# Altium PCB main.PcbDoc
Units mm, origin at the board's own origin, x right, y up, seen from the top; angles counter-clockwise.
Board outline 79 x 84 mm, 2 copper layers (Top Layer, Bottom Layer); 85 components, 80 nets, 350 pads, 74 vias.
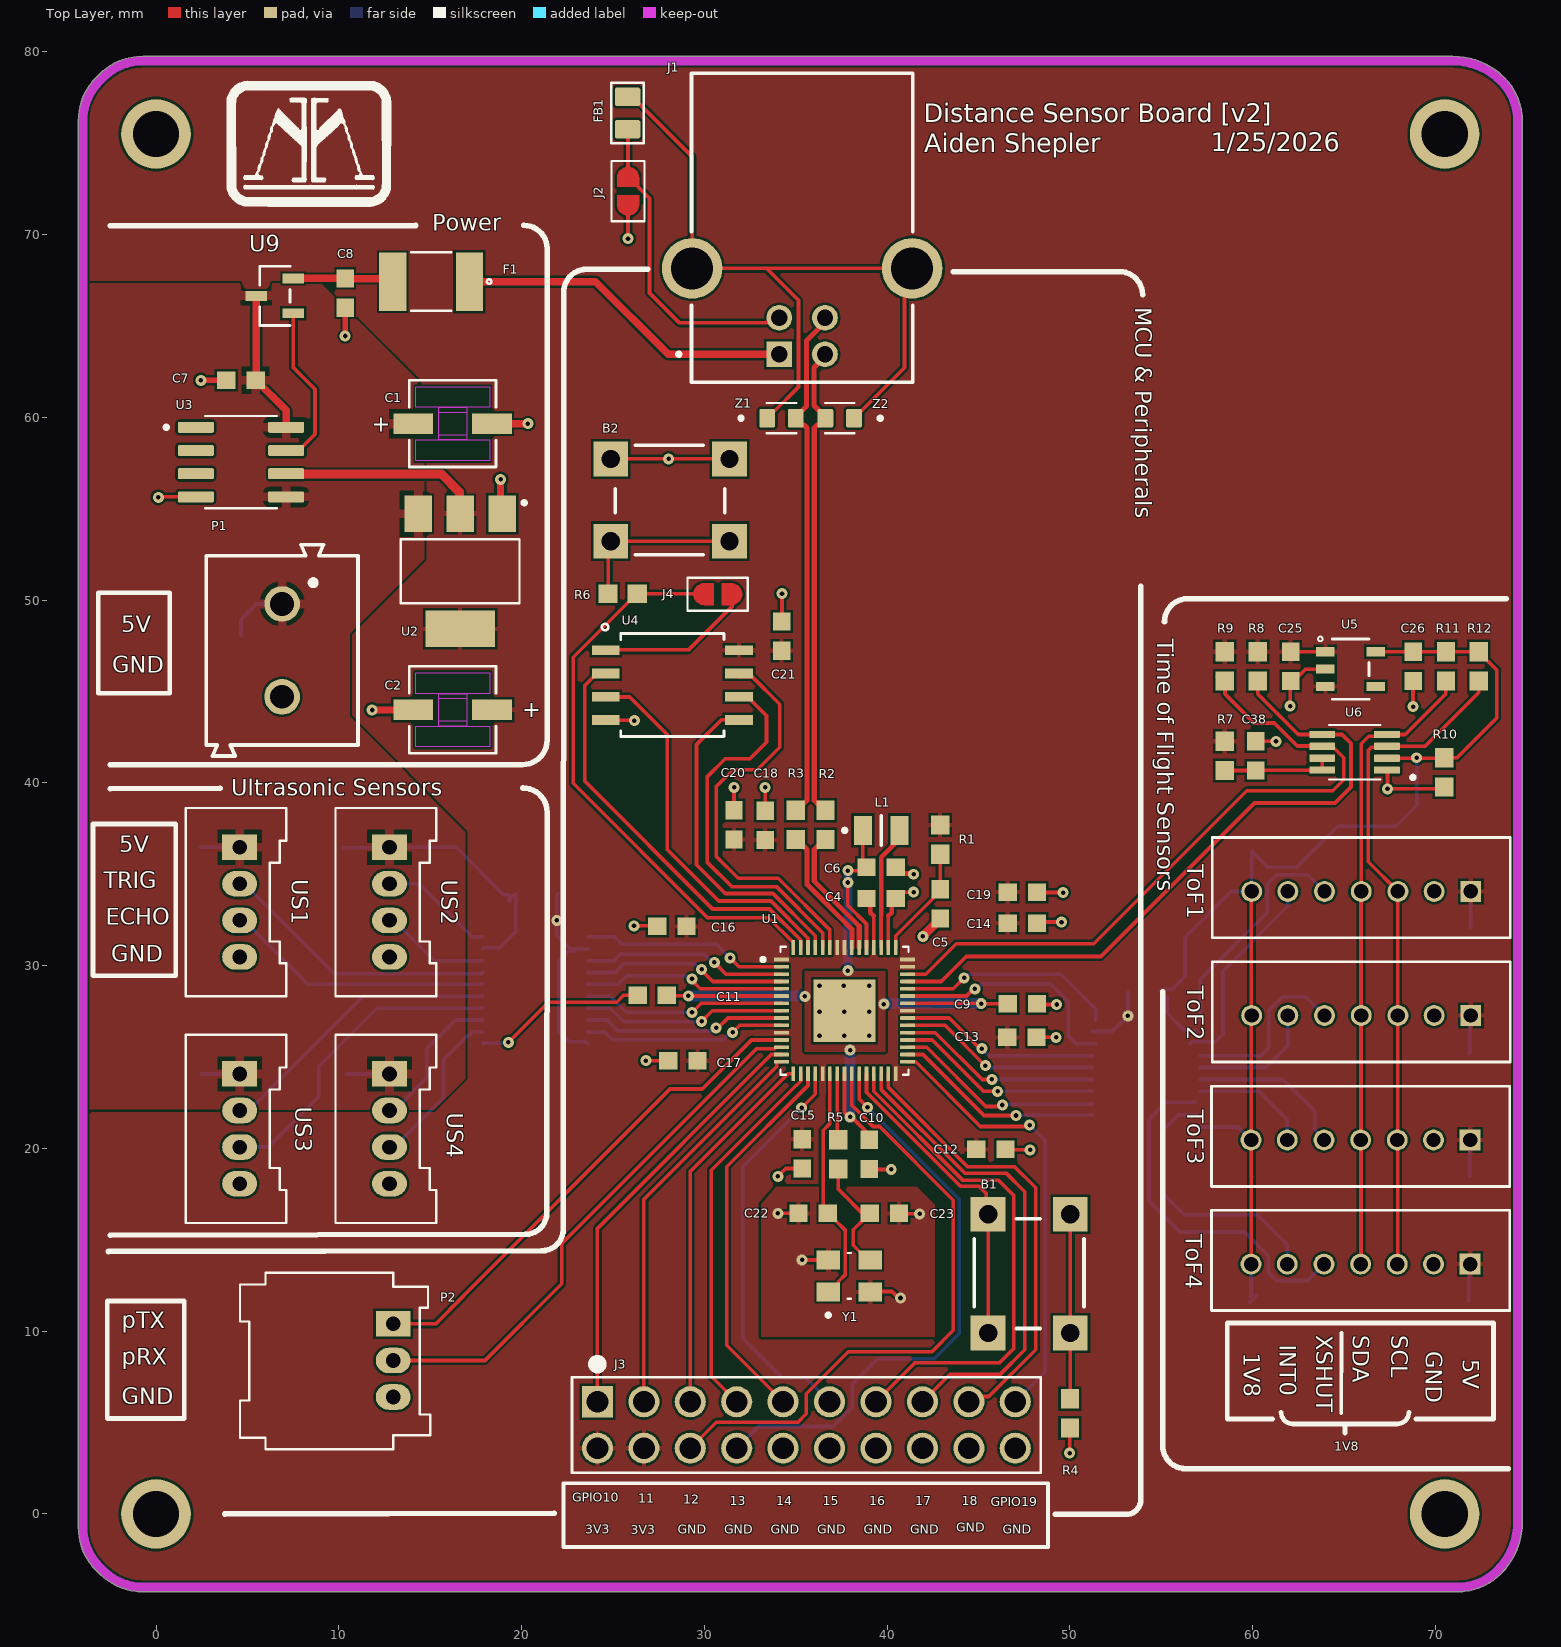
[diagram p0: Top Layer view]
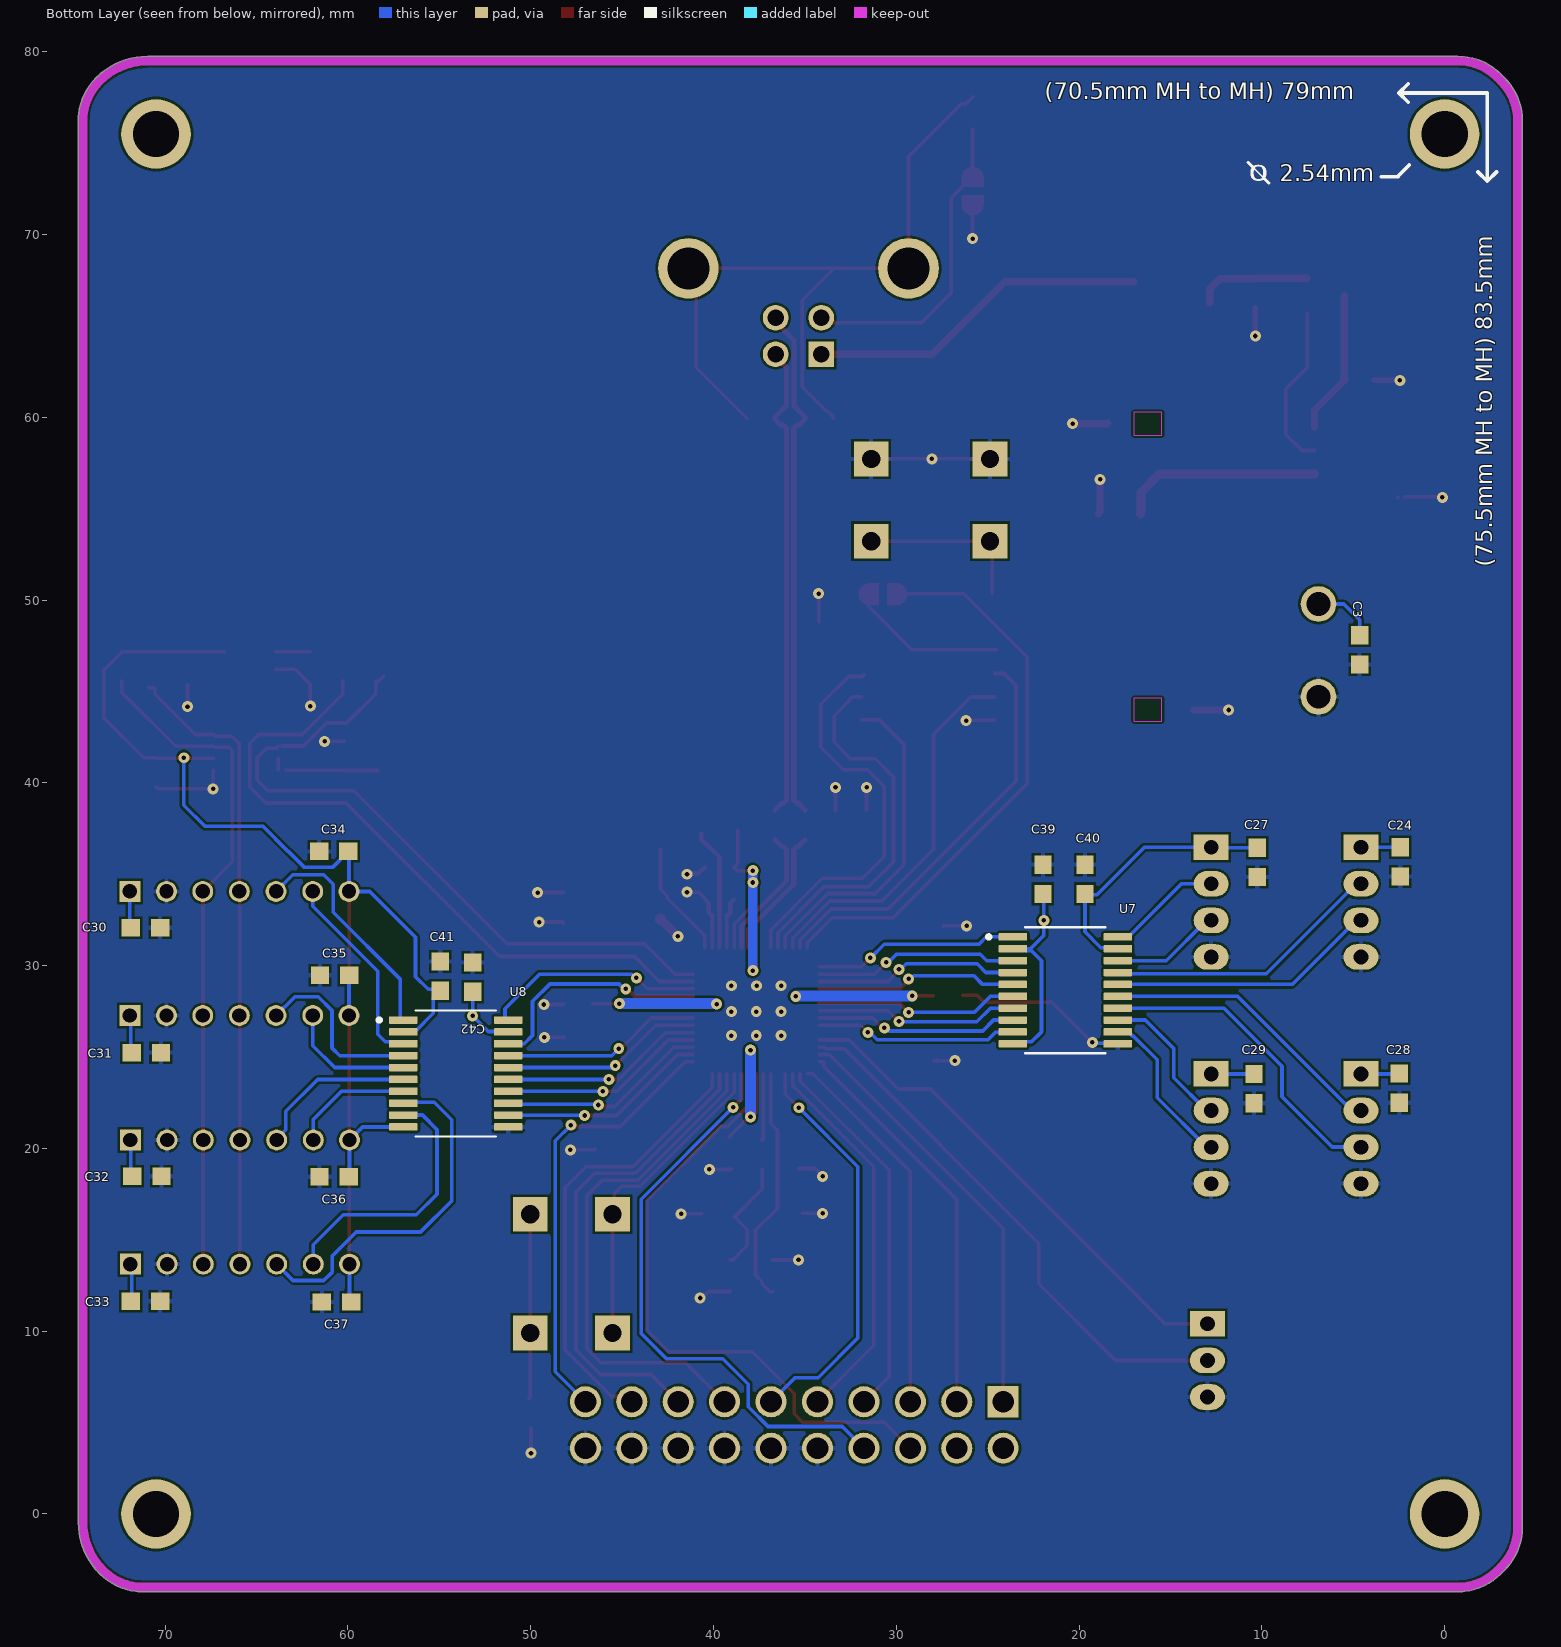
[diagram p1: Bottom Layer view, seen from below]

## Layer stack, top to bottom
Top Solder: solder mask 0.0102, Solder Resist, Dk 3.5
Top Layer: signal copper 0.0356
Dielectric 1: dielectric 0.32, FR-4, Dk 4.8
Bottom Layer: signal copper 0.0356
Bottom Solder: solder mask 0.0102, Solder Resist, Dk 3.5

## Board outline
-3.279,-3.075 cw(c-0.934,-0.73) -4.25,-0.73 -4.25,76.23 cw(c-0.934,76.23) -3.279,78.575 -3.075,78.779 cw(c-0.73,76.434) -0.73,79.75 70.942,79.75 cw(c70.942,75.738) 73.779,78.575 cw(c71.434,76.23) 74.73,76.6 74.75,76.5 74.75,-0.442 cw(c70.738,-0.442) 73.575,-3.279 cw(c71.23,-0.934) 71.6,-4.23 71.5,-4.25 -1,-4.25 -1.1,-4.23 cw(c-0.73,-0.934) -3.075,-3.279

## Design rules (kind name [scope] priority, off if disabled: settings)
Clearance [All] p1: gap=0.125 ignorepadtopadclearanceinfootprint=FALSE
DiffPairsRouting [All] p1: maxlimit=0.127 minlimit=0.127 mostfreqgap=0.127 toplayer_minwidth=0.2 toplayer_maxwidth=0.277 toplayer_prefwidth=0.277 bottomlayer_minwidth=0.2 bottomlayer_maxwidth=0.277 bottomlayer_prefwidth=0.277 impedanceprofiledriven=TRUE impedanceprofileid={42F0FB0B-BD3A-4B47-9FD5-915A8C1A7547} impedanceprofilevalue=90.000000 maxuncoupledlength=12.7
MinimumSolderMaskSliver [All] p1: minsoldermaskwidth=0.125
PlaneClearance [InNet('NetFB1_1')] p1: clearance=0.125
PlaneClearance PlaneClearance_1 [All] p2: clearance=0.125
PolygonConnect Polygon_5V_Connect [IsNamedPolygon('T.5V')] p1: connectstyle=Relief reliefconductorwidth=0.5 reliefentries=4 polygonreliefangle="90 Angle" airgapwidth=0.254
PolygonConnect Polygon_1V1-2_Connect_Direct [IsNamedPolygon('T.1V1-2')] p2: connectstyle=Direct reliefconductorwidth=0.254 reliefentries=4 polygonreliefangle="90 Angle" airgapwidth=0.254
PolygonConnect Polygon_3V3-1_Connect_Direct [IsNamedPolygon('T.3V3-1')] p3: connectstyle=Direct reliefconductorwidth=0.254 reliefentries=4 polygonreliefangle="90 Angle" airgapwidth=0.254
PolygonConnect Polygon_3V3-2/GND-12/1V1-1_Connect_Relief90 [IsNamedPolygon('T.1V1-1') or IsNamedPolygon('T.GND-1') or IsNamedPolygon('B.GND-1') or IsNamedPolygon('T.3V3-2') vs (IsThruPin or IsSMTPin or IsPad or IsComponentPad)] p4: connectstyle=Relief reliefconductorwidth=0.254 reliefentries=4 polygonreliefangle="90 Angle" airgapwidth=0.125
PolygonConnect Polygon_3V3-2/GND-12/1V1-1_Connect_Direct [IsNamedPolygon('T.1V1-1') or IsNamedPolygon('T.GND-1') or IsNamedPolygon('T.3V3-2') or IsNamedPolygon('B.GND-1') vs IsVia] p5: connectstyle=Direct reliefconductorwidth=0.254 reliefentries=4 polygonreliefangle="90 Angle" airgapwidth=0.254
RoutingVias [All] p1: holewidth=0.711 width=1.27 viastyle="Through Hole" minholewidth=0.2 minwidth=0.35 maxholewidth=0.711 maxwidth=1.27
SilkToSilkClearance [All] p1: silktosilkclearance=0.125
SilkToSolderMaskClearance [IsPad] p1: minsilkscreentomaskgap=0.125 clearancetoexposedcopper=TRUE
SolderMaskExpansion [All] p1: expansion=0.102 istentingtop=FALSE
SupplyNets "Schematic Supply Nets_4" [InNet('1V1')] p1: voltage=0.000
SupplyNets "Schematic Supply Nets_3" [InNet('1V8')] p2: voltage=0.000
SupplyNets "Schematic Supply Nets_2" [InNet('5V')] p3: voltage=0.000
SupplyNets "Schematic Supply Nets_1" [InNet('GND')] p4: voltage=0.000
SupplyNets "Schematic Supply Nets" [InNet('3V3')] p5: voltage=0.000
Width [All] p1: maxlimit=0.6 minlimit=0.2 preferedwidth=0.2
25 further rules are at their usual default settings.

## Classes and differential pairs
component class MCU: ` B1 B2 C1 C2 C3 C4 C5 C6 C7 C8 C9 C10 C11 C12 C13 C14 C15 C16 C17 C18 C19 C20 C21 C22 C23 F1 FB1 J1 J2 J3 J4 L1 P1 P2 R1 R2 R3 R4 R5 R6 U1 U2 U3 U4 U9 Y1 Z1 Z2
component class Distance-Sensors: C24 C25 C26 C27 C28 C29 C30 C31 C32 C33 C34 C35 C36 C37 C38 C39 C40 C41 C42 R7 R8 R9 R10 R11 R12 ToF1 ToF2 ToF3 ToF4 U5 U6 U7 U8 US1 US2 US3 US4
differential pair DX: +DX_P -DX_N
differential pair D: +D_P -D_N

## Components (designator, comment, footprint, x,y, rotation, side; value= is the part's Value field where it differs from the comment)
B1 "BOOT" SPST-PUSH-BUTTON 47.775,13.15 r0 top
B2 "BOOT" SPST-PUSH-BUTTON 28.125,55.475 r90 top
C1 "10uF" RADIAL_CAN_CAP_4_X_5.8_SMD 16.234,59.65 r0 top
C2 "10uF" RADIAL_CAN_CAP_4_X_5.8_SMD 16.234,44 r180 top
C3 "Cap" CAPC0603 4.65,47.275 r270 bottom value=100nF
C4 "Cap" CAPC0603 39.675,33.675 r0 top value=4.7uF
C5 "Cap" CAPC0603 42.9,33.375 r270 top value=4.7uF
C6 "Cap" CAPC0603 39.675,35.375 r0 top value=4.7uF
C7 "Cap" CAPC0603 4.65,62.025 r180 top value=100nF
C8 "Cap" CAPC0603 10.35,66.8 r90 top value=100nF
C9 "Cap" CAPC0603 47.4,27.925 r0 top value=100nF
C10 "Cap" CAPC0603 39.025,19.675 r270 top value=4.7uF
C11 "Cap" CAPC0603 27.15,28.375 r180 top value=100nF
C12 "Cap" CAPC0603 45.675,19.95 r0 top value=100nF
C13 "Cap" CAPC0603 47.375,26.075 r0 top value=100nF
C14 "Cap" CAPC0603 47.4,32.325 r0 top value=100nF
C15 "Cap" CAPC0603 35.35,19.7 r270 top value=100nF
C16 "Cap" CAPC0603 28.225,32.15 r180 top value=100nF
C17 "Cap" CAPC0603 28.825,24.8 r180 top value=100nF
C18 "Cap" CAPC0603 33.325,37.675 r90 top value=100nF
C19 "Cap" CAPC0603 47.4,34.025 r0 top value=100nF
C20 "Cap" CAPC0603 31.625,37.7 r90 top value=100nF
C21 "Cap" CAPC0603 34.225,48.025 r90 top value=100nF
C22 "Cap" CAPC0603 35.95,16.45 r180 top value=15pF
C23 "Cap" CAPC0603 39.85,16.45 r0 top value=15pF
C24 "Cap" CAPC0603 2.425,35.675 r270 bottom value=100nF
C25 "Cap" CAPC0603 62.075,46.375 r270 top value=1uF
C26 "Cap" CAPC0603 68.775,46.375 r270 top value=1uF
C27 "Cap" CAPC0603 10.25,35.65 r270 bottom value=100nF
C28 "Cap" CAPC0603 2.475,23.3 r270 bottom value=100nF
C29 "Cap" CAPC0603 10.425,23.275 r270 bottom value=100nF
C30 "Cap" CAPC0603 71.075,32.075 r180 bottom value=100nF
C31 "Cap" CAPC0603 71.031,25.239 r180 bottom value=100nF
C32 "Cap" CAPC0603 71,18.475 r180 bottom value=100nF
C33 "Cap" CAPC0603 71.075,11.639 r180 bottom value=100nF
C34 "Cap" CAPC0603 60.775,36.25 r0 bottom value=100nF
C35 "Cap" CAPC0603 60.725,29.475 r0 bottom value=100nF
C36 "Cap" CAPC0603 60.75,18.45 r0 bottom value=100nF
C37 "Cap" CAPC0603 60.625,11.6 r0 bottom value=100nF
C38 "Cap" CAPC0603 60.175,41.475 r90 top value=100pF
C39 "Cap" CAPC0603 21.975,34.725 r270 bottom value=100nF
C40 "Cap" CAPC0603 19.675,34.725 r90 bottom value=100nF
C41 "Cap" CAPC0603 54.95,29.425 r270 bottom value=100nF
C42 "Cap" CAPC0603 53.175,29.375 r270 bottom value=100nF
F1 "MF-MSMF050-2" FUSM4632X85 15.05,67.425 r180 top
FB1 "MH2029-300Y" L0805 25.8,76.65 r270 top
J1 "USB-B" SAMTEC_USB-B-S-X-X-TH 35.35,68.15 r180 top
J2 "Thru-Hole Jumper" "[Jumper] Solderable Jumper" 25.825,72.375 r270 top
J3 "[Connector] 879142016" "[Connector] CONN20" 24.15,6.14 r0 top
J4 "Thru-Hole Jumper" "[Jumper] Solderable Jumper" 30.73,50.325 r0 top
L1 "3.3uH" 2016_SMD_Inductor 39.675,37.4 r0 top
P1 "2 port screw" "[CONNECTOR] 5MM_2PORT_SCREW" 6.9,47.25 r270 top
P2 "UART" MOLEX-HDR-1X3-SHERLOCK-RA 12.975,10.4 r90 top
R1 "Res" RES0603 42.9,36.9 r270 top value=33
R2 "Res" RES0603 36.625,37.7 r270 top value=27
R3 "Res" RES0603 35,37.7 r270 top value=27
R4 "Res" RES0603 50,5.5 r90 top value=1k
R5 "Res" RES0603 37.325,19.675 r90 top value=1k
R6 "Res" RES0603 25.525,50.35 r0 top value=1k
R7 "Res" RES0603 58.475,41.475 r270 top value=200k
R8 "Res" RES0603 60.275,46.375 r270 top value=1k
R9 "Res" RES0603 58.475,46.375 r270 top value=1k
R10 "Res" RES0603 70.475,40.575 r270 top value=300k
R11 "Res" RES0603 70.575,46.375 r270 top value=1k
R12 "Res" RES0603 72.375,46.375 r270 top value=1k
ToF1 "ToF 1" 7POS_2MM_CONN 71.933,34.061 r0 top
ToF2 "ToF 2" 7POS_2MM_CONN 71.933,27.27 r0 top
ToF3 "ToF 3" 7POS_2MM_CONN 71.9,20.461 r0 top
ToF4 "ToF 4" 7POS_2MM_CONN 71.9,13.67 r0 top
U1 "[MCU] RP2350" QFN40P700X700X90-61N 37.67,27.536 r0 top
U2 "NCP1117LPST33T3G" SOT230P700X175-4N 16.641,51.575 r270 top
U3 "LMV358IDR" SOIC-8 4.65,57.55 r0 top
U4 "W25Q128JVSIQ TR" SOIC_208MIL_WIN 28.25,45.35 r0 top
U5 "ADPL40502AUJZ-1.8-R7" TSOT-23-5_UJ-5_ADI 65.353,46.225 r0 top
U6 "PCA9306DCTR" SOP65P400X130-8N 65.575,41.675 r180 top
U7 "[IC] TXS0108EQPWRQ1" SOP65P640X120-20N 20.75,28.65 r180 bottom
U8 "[IC] TXS0108EQPWRQ1" SOP65P640X120-20N 54.1,24.1 r180 bottom
U9 "PMV48XP,215" SOT23_NEX 6.499,66.644 r90 top
US1 "USS1" MOLEX-HDR-1X4-SHERLOCK-VERT 4.575,36.475 r90 top
US2 "USS2" MOLEX-HDR-1X4-SHERLOCK-VERT 12.775,36.475 r90 top
US3 "USS3" MOLEX-HDR-1X4-SHERLOCK-VERT 4.575,24.075 r90 top
US4 "USS4" MOLEX-HDR-1X4-SHERLOCK-VERT 12.775,24.075 r90 top
Y1 "ABM8-272-T3" XTAL_ABM8-272-T3 37.925,13.025 r90 top
Z1 "VAR" VARC1608X56N 34.22,59.95 r0 top
Z2 "VAR" VARC1608X56N 37.405,59.95 r180 top

## Footprints (in the part's own frame and the unit in brackets; to place one, negate y for a bottom-side part, rotate by r counter-clockwise, add the part's x,y. Pads: shape width x height; smd on the part's side, far side on the other; paste and mask are expansions set on the pad)
7POS_2MM_CONN [mil]
  rect 45x45 / inner round 45 / far side rect 45x45 hole 31: 1(0,0)
  round 45 hole 31: 2(-79,0) 3(-157,0) 4(-236,0) 5(-315,0) 6(-394,0) 7(-472,0)
  silkscreen extent -557,-100 85,116, body extent -556,-100 86,118, height 337
2016_SMD_Inductor [mm] "0806 (2016 Metric)"
  rect 1x1.6 smd: 1(-1,0) 2(1,0)
  silkscreen extent -2.1,-0.8 0,0.8, body extent -1,-0.8 1,0.8, height 0.95
"[CONNECTOR] 5MM_2PORT_SCREW" [mm] "5.08 mm pitch 2 port screw terminal / 691213510002"
  round 1.95 hole 1.3: 1(-2.54,0) 2(2.54,0)
  silkscreen extent -5.78,-4.15 5.78,4.15, body extent -5.68,-4.04 5.68,4.06, height 10
"[Connector] CONN20" [mil]
  rect 67x67 / inner round 67 / far side rect 67x67 hole 47: 1(0,0)
  round 67 hole 47: 2(0,-100) 3(100,0) 4(100,-100) 5(200,0) 6(200,-100) 7(300,0) 8(300,-100) 9(400,0) 10(400,-100) 11(500,0) 12(500,-100) 13(600,0) 14(600,-100) 15(700,0) 16(700,-100) 17(800,0) 18(800,-100) 19(900,0) 20(900,-100)
  silkscreen extent -55,-153 955,91, body extent -50,-151 950,45, height 325
"[Jumper] Solderable Jumper" [mil]
  round 1 smd: 1(-30.71,0) 2(30.71,0)
  Top Layer region: 8.9,-23.62 8.9,23.62 28.9,23.62 28.9,23.62 39.15,21.28 47.37,14.73 51.93,5.26 51.93,-5.26 47.37,-14.73 39.15,-21.28 28.9,-23.62 28.9,-23.62
  Top Layer region: -8.9,-23.62 -8.9,23.62 -28.9,23.62 -28.9,23.62 -39.15,21.28 -47.37,14.73 -51.93,5.26 -51.93,-5.26 -47.37,-14.73 -39.15,-21.28 -28.9,-23.62 -28.9,-23.62
  silkscreen extent -65,-35 65,35
CAPC0603 [mm] "Chip Capacitor, 2-Leads, Body 1.60x0.80mm, IPC Medium Density"
  rect 1x0.95 smd: 1(-0.8,0) 2(0.8,0)
  body extent -0.88,-0.48 0.87,0.48, height 0.8
FUSM4632X85 [mm]
  rect 1.5x3.2 smd: 1(-2.1,0) 2(2.1,0)
  silkscreen extent -3.3,-1.6 1.1,1.6, body extent -2.27,-1.62 2.27,1.62, height 1.1
L0805 [mil]
  rrect25% 40x55 smd: 1(-35,0) 2(35,0)
  silkscreen extent -65,-35 65,35, body extent -39,-24 39,24, height 43
MOLEX-HDR-1X3-SHERLOCK-RA [mm]
  rect 1.397x1.905 hole 0.8: 1(0,0)
  oval 1.397x1.905 hole 0.8: 2(-2,0) 3(-4,0)
  silkscreen extent -6.86,-2.03 2.79,8.38, body extent -6.88,-1.99 2.82,8.51, height 5.75
MOLEX-HDR-1X4-SHERLOCK-VERT [mm]
  rect 1.397x1.905 hole 0.8: 1(0,0)
  oval 1.397x1.905 hole 0.8: 2(-2,0) 3(-4,0) 4(-6,0)
  silkscreen extent -8.15,-2.55 2.15,2.95, body extent -8.13,-2.57 2.17,2.98, height 8.5
QFN40P700X700X90-61N [mm] "RP2350"
  rrect25% 0.81x0.2 smd paste+0 mask+0.102: 1(-3.45,2.8) 2(-3.45,2.4) 3(-3.45,2) 4(-3.45,1.6) 5(-3.45,1.2) 6(-3.45,0.8) 7(-3.45,0.4) 8(-3.45,0) 9(-3.45,-0.4) 10(-3.45,-0.8) 11(-3.45,-1.2) 12(-3.45,-1.6) 13(-3.45,-2) 14(-3.45,-2.4) 15(-3.45,-2.8) 31(3.45,-2.8) 32(3.45,-2.4) 33(3.45,-2) 34(3.45,-1.6) 35(3.45,-1.2) 36(3.45,-0.8) 37(3.45,-0.4) 38(3.45,0) 39(3.45,0.4) 40(3.45,0.8) 41(3.45,1.2) 42(3.45,1.6) 43(3.45,2) 44(3.45,2.4) 45(3.45,2.8)
  rrect25% 0.2x0.81 smd paste+0 mask+0.102: 16(-2.8,-3.45) 17(-2.4,-3.45) 18(-2,-3.45) 19(-1.6,-3.45) 20(-1.2,-3.45) 21(-0.8,-3.45) 22(-0.4,-3.45) 23(0,-3.45) 24(0.4,-3.45) 25(0.8,-3.45) 26(1.2,-3.45) 27(1.6,-3.45) 28(2,-3.45) 29(2.4,-3.45) 30(2.8,-3.45) 46(2.8,3.45) 47(2.4,3.45) 48(2,3.45) 49(1.6,3.45) 50(1.2,3.45) 51(0.8,3.45) 52(0.4,3.45) 53(0,3.45) 54(-0.4,3.45) 55(-0.8,3.45) 56(-1.2,3.45) 57(-1.6,3.45) 58(-2,3.45) 59(-2.4,3.45) 60(-2.8,3.45)
  rect 3.4x3.4 smd paste-0.62 mask+0.102: 61(0,0)
  silkscreen extent -4.56,-3.5 3.5,3.5, body extent -3.55,-3.55 3.55,3.55, height 0.96
RADIAL_CAN_CAP_4_X_5.8_SMD [mil]
  rect 86x45 smd paste+0 mask+0: 1(-85,0) 2(85,0)
  Top Layer keep-out region: -30,-35 -30,35 30,35 30,-35
  Top Layer keep-out region: -80,-80 -80,-35 80,-35 80,-80
  Top Layer keep-out region: -80,35 -80,80 80,80 80,35
  Keep-Out Layer region: -30,-24.5 -30,24.5 30,24.5 30,-24.5
  silkscreen extent -94,-94 94,94, body extent -108,-89 108,89, height 242
RES0603 [mm] "Chip Resistor, 2-Leads, Body 1.60x0.80mm, IPC Medium Density"
  rect 1.05x1 smd: 1(-0.8,0) 2(0.8,0)
  body extent -0.88,-0.48 0.87,0.47, height 0.8
SAMTEC_USB-B-S-X-X-TH [mm]
  rect 1.408x1.408 / inner round 1.408 / far side rect 1.408x1.408 hole 0.9: 1(1.25,4.7)
  round 1.408 hole 0.9: 2(-1.25,4.7) 3(-1.25,2.7) 4(1.25,2.7)
  round 3.316 hole 2.3: S1(-6.02,0) S2(6.02,0)
  silkscreen extent -6.05,-10.67 6.85,6.22, body extent -7.25,-10.39 7.25,6.11, height 10.7
SOIC-8 [mm] "127P599X175-8N"
  rrect25% 1.97x0.6 smd: 1(-2.47,1.905) 2(-2.47,0.635) 3(-2.47,-0.635) 4(-2.47,-1.905) 5(2.47,-1.905) 6(2.47,-0.635) 7(2.47,0.635) 8(2.47,1.905)
  silkscreen extent -4.19,-2.52 1.95,2.52, body extent -3,-2.45 3,2.45, height 1.75
SOIC_208MIL_WIN [mil]
  rect 60x21 smd paste+0 mask+0: 1(-143.5,75) 2(-143.5,25) 3(-143.5,-25) 4(-143.5,-75) 5(143.5,-75) 6(143.5,-25) 7(143.5,25) 8(143.5,75)
  silkscreen extent -152,-111 111,132, body extent -159,-106 159,106, height 85
SOP65P400X130-8N [mm]
  rrect25% 1.42x0.4 smd: 1(-1.77,0.975) 2(-1.77,0.325) 3(-1.77,-0.325) 4(-1.77,-0.975) 5(1.77,-0.975) 6(1.77,-0.325) 7(1.77,0.325) 8(1.77,0.975)
  silkscreen extent -3.29,-1.5 1.4,1.5, body extent -2,-1.47 2,1.47, height 1.3
SOP65P640X120-20N [mm]
  rrect25% 1.57x0.41 smd: 1(-2.87,2.925) 2(-2.87,2.275) 3(-2.87,1.625) 4(-2.87,0.975) 5(-2.87,0.325) 6(-2.87,-0.325) 7(-2.87,-0.975) 8(-2.87,-1.625) 9(-2.87,-2.275) 10(-2.87,-2.925) 11(2.87,-2.925) 12(2.87,-2.275) 13(2.87,-1.625) 14(2.87,-0.975) 15(2.87,-0.325) 16(2.87,0.325) 17(2.87,0.975) 18(2.87,1.625) 19(2.87,2.275) 20(2.87,2.925)
  silkscreen extent -4.29,-3.45 2.2,3.45, body extent -3.2,-3.25 3.2,3.25, height 1.2
SOT23_NEX [mil] "TO-236 (PMOS)"
  rect 21x46 smd paste+0 mask+0: 1(-37.4,-40) 2(37.4,-40) 3(0,40)
  silkscreen extent -64,-33 64,33, body extent -59,-49 59,49, height 43
SOT230P700X175-4N [mm]
  rect 2x1.5 smd: 1(-3.15,2.3) 2(-3.15,0) 3(-3.15,-2.3)
  rect 2x3.8 smd: 4(3.15,0)
  silkscreen extent -3.85,-3.25 1.75,3.6, body extent -3.5,-3.25 3.5,3.25, height 1.8
SPST-PUSH-BUTTON [mm] "1825910-6"
  rect 1.9x1.9 hole 1: 1(2.25,3.25) 2(2.25,-3.25) 3(-2.25,-3.25) 4(-2.25,3.25)
  silkscreen extent -3,-3 3,3, body extent -3,-4 2.99,3.8, height 5.11
TSOT-23-5_UJ-5_ADI [mil] "SOT23_5, Thin"
  rect 39.5x20 smd paste+0 mask+0: 1(-54.25,37.4) 2(-54.25,0) 3(-54.25,-37.4) 4(54.25,-37.4) 5(54.25,37.4)
  silkscreen extent -70,-65 40,70, body extent -60,-60 60,60, height 39
VARC1608X56N [mm]
  rrect25% 0.87x1.02 smd: 1(-0.78,0) 2(0.78,0)
  silkscreen extent -2.31,-0.83 0.8,0.83, body extent -0.8,-0.4 0.8,0.4, height 0.33
XTAL_ABM8-272-T3 [mm]
  rect 1.05x1.3 smd: 1(-0.875,1.15) 2(-0.875,-1.15) 3(0.875,-1.15) 4(0.875,1.15)
  silkscreen extent -2.24,-0.09 1.25,1.25, body extent -1.25,-1.6 1.25,1.6, height 0.7

## Part data
B1 B2: library part 1825910-6, "SWITCH TACTILE SPST-NO 0.05A 24V", Contact Current Rating=50mA, Contact Resistance=100mR, Manufacturer="TE Connectivity Alcoswitch", Max Operating Temperature=85°C, Max Voltage Rating (DC)=24V, Min Operating Temperature=-35°C, Operating Force=160gf, Package Quantity=750, Supplier Part Number 1=450-1650-ND, Actuator Length=0.055inch, Actuator Material=PBT, Actuator Type=Standard, Category="Pushbutton Switches", ComponentLink1Description=https://datasheet.ciiva.com/30199/1825910-6rqpn1825910-6-30199520.pdf?src-supplier=Onlinecomponents.com, ComponentLink1URL=https://datasheet.ciiva.com/30199/1825910-6rqpn1825910-6-30199520.pdf?src-supplier=Onlinecomponents.com, ComponentLink2Description=https://datasheet.ciiva.com/15184/getdatasheetpartid-395915-15184509.pdf?src-supplier=Verical, ComponentLink2URL=https://datasheet.ciiva.com/15184/getdatasheetpartid-395915-15184509.pdf?src-supplier=Verical, Contact Material="Copper Alloy", Contact Plating=Silver, Electrical Life=100000Cycles, ELV=Compliant, Illumination Type=Non-Illuminated,Illuminated, Lead Free="Lead Free", Length=5.99mm, Manufacturer Part Number=1825910-6, Max Current Rating=50mA, Mechanical Life=100000Cycles, Mount="Through Hole", Orientation=Straight, Packaging="Loose Piece", Pricing 1="1=0,10000, 10=0,10100, 25=0,09560, 100=0,08700, 250=0,08180, 500=0,07484, 1000=0,06265, 2500=0,06092, 5000=0,05743 (USD)", REACH SVHC=Unknown, RoHS=Yes, Stock 1=97530, Supplier 1=Digi-Key, Switch Function=Off-Mom, Switch Travel=0.25mm, Termination="PC Pins", Throw Configuration=SPST, Type=Switch
C1 C2: library part EEE-FK1E100R, "10uF electrolytic cap, radial can, SMD", Manufacturer_Name=Panasonic, Copyright="Copyright (C) 2025 Ultra Librarian. All rights reserved.", Manufacturer_Part_Number=EEE-FK1E100R
C3 C4 C5 C6 C7 C8 C9 C10 C11 C12 C13 C14 C15 C16 C17 C18 C19 C20 C21 C22 C23 C24 C25 C26 C27 C28 C29 C30 C31 C32 C33 C34 C35 C36 C37 C38 C39 C40 C41 C42: Supplier Part Number 1=1276-1000-1-ND, Supplier 1=Digi-Key
F1: "[Fuse] Polymeric PTC Resettable Fuse 15V 500 mA Ih Surface Mount 1812 (4532 Metric), Concave", Package="1812 Bourns", Availability="In Stock", Check_prices=https://www.snapeda.com/parts/MF-MSMF050-2/Bourns+-+J.W.+Miller/view-part/?ref=eda, MF=Bourns, MP=MF-MSMF050-2, Price=None, Purchase-URL=https://pricing.snapeda.com/search/part/MF-MSMF050-2/?ref=eda, SnapEDA_Link=https://www.snapeda.com/parts/MF-MSMF050-2/Bourns+-+J.W.+Miller/view-part/?ref=snap
FB1: "[Inductor] Ferrite Bead Bourns MH2029-300Y / SMD-FERRITE-BEAD-30R-3A(0805)", Package="0805 Bourns", Check_prices=https://www.snapeda.com/parts/MH2029-300Y/Bourns/view-part/?ref=eda, MF=Bourns, MP=MH2029-300Y, SnapEDA_Link=https://www.snapeda.com/parts/MH2029-300Y/Bourns/view-part/?ref=snap
J1: library part USB-B-S-X-X-TH, "USB-B (USB TYPE-B) USB 2.0 Receptacle Connector 4 Position Through Hole, Right Angle", Package=None, Check_prices=https://www.snapeda.com/parts/USB-B-S-F-W-TH-TR/Samtec/view-part/?ref=eda, MF=Samtec, MP=USB-B-S-F-W-TH-TR, SnapEDA_Link=https://www.snapeda.com/parts/USB-B-S-F-W-TH-TR/Samtec/view-part/?ref=snap
J2 J4: library part "[Jump] Thru-Hole 2pin", "Clip Jumper", NO/NC=NC
J3: "2x10 2.54mm pitch header", Package=None, Availability=Unavailable, MP=879142016, Price=None
L1: library part "INDUCTOR 3.3uH", "Power Inductors - SMD IND 3.3uH used for RP2350 VREG", Manufacturer_Name=ABRACON, Manufacturer_Part_Number=AOTA-B201610S3R3-101-T, Mouser Part Number=815-AB201610S3R3101T, Datasheet Link=https://abracon.com/datasheets/AOTA-B201610S3R3-101-T.pdf, Geometry.Height=1mm, Mouser Price/Stock=https://www.mouser.co.uk/ProductDetail/ABRACON/AOTA-B201610S3R3-101-T?qs=%252BXxaIXUDbq0IZvJW%2F2mv4w%3D%3D
P1: library part "[Connector] 691213510002", "2 Position Wire to Board Terminal Block Horizontal with Board 0.200 (5.08mm) Through Hole", Package=None, Check_prices=https://www.snapeda.com/parts/691213510002/W%25C3%25BCrth+Elektronik+Midcom/view-part/?ref=eda, MF="WÃ¼rth Elektronik", MP=691213510002, SnapEDA_Link=https://www.snapeda.com/parts/691213510002/W%25C3%25BCrth+Elektronik+Midcom/view-part/?ref=snap
P2: library part MOLEX-HDR-1x3-SHERLOCK_RA, "Header, Molex, 2mm Pitch Sherlock Header, Single Row, Right Angle 3 Circuits, Length 3.3mm", Manufacturer="Molex Connector Corporation", Manufacturer Part Number=35363-0360, Supplier Part Number 1=WM18932-ND, Supplier 1=Digi-Key
R1 R2 R3 R4 R5 R6 R7 R8 R9 R10 R11 R12: "SMD, RES0603", Supplier Part Number 1=RMCF0603JT10K0CT-ND, Supplier 1=Digi-Key
ToF1 ToF2 ToF3 ToF4: library part MOLEX_SHERLOCK_1x7_CONN, "1x7 2mm pitch sherlock connector", Package=None, Availability=Unavailable, MP=353620750, Price=None
U1: library part SC1509(13), "RP2350A MCU from Raspberry Pi Pico; QFN 60 7x7,", Package=None, Check_prices=https://www.snapeda.com/parts/SC1509-A4/Raspberry+Pi/view-part/?ref=eda, MF="Raspberry Pi", MP=SC1509-A4, SnapEDA_Link=https://www.snapeda.com/parts/SC1509-A4/Raspberry+Pi/view-part/?ref=snap
U2: "Linear Voltage Regulator IC Positive Fixed 1 Output 1A SOT-223", Package="SOT-223-4 ON Semiconductor", Check_prices=https://www.snapeda.com/parts/NCP1117LPST33T3G/Onsemi/view-part/?ref=eda, MF="ON Semiconductor", MP=NCP1117LPST33T3G, SnapEDA_Link=https://www.snapeda.com/parts/NCP1117LPST33T3G/Onsemi/view-part/?ref=snap
U3: "[Op-Amp] Dual, 5.5-V, 1-MHz, RRO operational amplifier 8-SOIC -40 to 125", Manufacturer_Name="Texas Instruments", Copyright="Copyright (C) 2025 Ultra Librarian. All rights reserved.", Datasheet=https://www.ti.com/lit/gpn/lmv358, Manufacturer_Part_Number=LMV358IDR, RefDes=RefDes, Type=Type
U4: "IC FLASH 128MBIT SPI/QUAD 8SOIC", Manufacturer_Name=Winbond, Copyright="Copyright (C) 2025 Ultra Librarian. All rights reserved.", Manufacturer_Part_Number="W25Q128JVSIQ TR", RefDes=RefDes, Type=Type
U5: "Low Noise, 200mA, CMOS Linear Regulator (LDO)", Manufacturer_Name="Analog Devices Inc", Copyright="Copyright (C) 2025 Ultra Librarian. All rights reserved.", Manufacturer_Part_Number=ADPL40502AUJZ-1.8-R7, RefDes=RefDes, Type=Type
U6: "2-bit bidirectional 400-kHz I2C/SMBus voltage level translator", Package="SSOP-8 Texas Instruments", Check_prices=https://www.snapeda.com/parts/PCA9306DCTR/Texas+Instruments/view-part/?ref=eda, MF="Texas Instruments", MP=PCA9306DCTR, SnapEDA_Link=https://www.snapeda.com/parts/PCA9306DCTR/Texas+Instruments/view-part/?ref=snap
U7 U8: "Automotive eight-bit bidirectional voltage level shifter for open-drain and push-pull applications", Package="TSSOP-20 Texas Instruments", Check_prices=https://www.snapeda.com/parts/TXS0108EQPWRQ1/Texas+Instruments/view-part/?ref=eda, ComponentLink1Description=DigiKey_Link, ComponentLink1URL=https://www.digikey.com/en/products/detail/texas-instruments/TXS0108EQPWRQ1/5324256?s=N4IgTCBcDaICoA0DKAGAjCgHAUQIoAUB1AJVzRAF0BfIA, MF="Texas Instruments", MP=TXS0108EQPWRQ1, SnapEDA_Link=https://www.snapeda.com/parts/TXS0108EQPWRQ1/Texas+Instruments/view-part/?ref=snap
U9: library part "[PMOS] PMV48XP,215", "MOSFET P-CH 20V 3.5A TO236AB", Manufacturer_Name=Nexperia, Copyright="Copyright (C) 2025 Ultra Librarian. All rights reserved.", Manufacturer_Part_Number=PMV48XP,215
US1 US2 US3 US4: library part MOLEX-HDR-1x4-SHERLOCK_VERT, "Header, Molex, 2mm Pitch Sherlock Header, Single Row, Vertical, 4 Circuits, Length 3.3mm, 0353620450"
Y1: "12 MHz Â±30ppm Crystal 10pF 50 Ohms 4-SMD, No Lead", Package="NON-STANDARD-4 Abracon", Check_prices=https://www.snapeda.com/parts/ABM8-272-T3/Abracon/view-part/?ref=eda, MF=ABRACON, MP=ABM8-272-T3, SnapEDA_Link=https://www.snapeda.com/parts/ABM8-272-T3/Abracon/view-part/?ref=snap
Z1 Z2: library part CG0603MLC-05E, "[Varistor] 1 Circuit Surface Mount, MLCV 0603 (1608 Metric)", Package="0603 Bourns Inc.", Availability="In Stock", Check_prices=https://www.snapeda.com/parts/CG0603MLC-05E/Bourns+-+J.W.+Miller/view-part/?ref=eda, MF=Bourns, MP=CG0603MLC-05E, Price=None, Purchase-URL=https://pricing.snapeda.com/search/part/CG0603MLC-05E/?ref=eda, SnapEDA_Link=https://www.snapeda.com/parts/CG0603MLC-05E/Bourns+-+J.W.+Miller/view-part/?ref=snap

## Free pads (board coordinates)
  round 3.81 hole 2.54: MH(0,0) MH(0,75.5) MH(70.5,0) MH(70.5,75.5)

## Via types
v1: diameter 0.6, hole 0.25, Top Layer to Bottom Layer, tented both sides, 74 vias

## Nets (pads, with @x,y where several pads share a name; then routed paths per layer and width w, separated by ;. In a path a pad name is that pad's centre, name@x,y a point inside that pad or via, vN(x,y) a via of type N, cw(c..) or ccw(c..) an arc to the next point about the centre after c; other vN are vias at no path point)
1V1: C6.1 C9.1 C10.1 C11.1 L1.1 U1.6 U1.23 U1.39 U1.50 | length 44
  Top Layer w0.2: C11.1@27.975,28.35 v1(29.125,28.35) 29.139,28.336 U1.6 ; U1.23 37.67,21.962 37.975,21.656 v1@37.975,21.575 ; v1(37.85,34.55) 37.85,33.3 38.87,32.28 U1.50 ; v1(37.85,35.2) 38.7,35.2 C6.1 38.675,35.575 L1.1 ; v1(37.975,21.725) 38.05,21.725 39.125,20.65 C10.1@39.125,20.625 ; U1.39 v1@45.139,27.936 ; v1(45.15,27.925) C9.1
  Bottom Layer w0.5: v1(37.85,29.725) v1(37.85,34.55) v1(37.85,35.2)
  Bottom Layer w0.6: v1(29.125,28.35) 35.475,28.35 v1(35.5,28.325) ; v1(37.975,21.725) v1(37.975,25.375) ; v1(39.825,27.9) 39.85,27.925 v1(45.15,27.925)
1V8: C26.1 C34.1 C35.1 C36.1 C37.1 C41.2 R10.1 R11.1 R12.1 ToF1.7 ToF2.7 ToF3.7 ToF4.7 U5.5 U6.2 U8.2 U8.10 | length 74.2
  Top Layer w0.2: ToF4.7 59.927,13.686 59.927,34.045 ToF1.7 ; U5.5 C26.1 R12.1 72.375,47.15 73.35,46.175 73.35,43.55 71.175,41.375 R10.1 70.45,41.35 U6.2
  Bottom Layer w0.2: U8.2 56.865,26.48 56.237,26.48 55.325,27.392 55.325,28.25 C41.2 55.033,28.708 55.608,28.708 56.3,29.4 56.3,31.55 58.811,34.061 ToF1.7 59.944,36.219 C34.1 60.85,35.375 62.375,35.375 63.25,36.25 63.275,36.25 64.65,37.625 67.825,37.625 68.975,38.775 v1(68.975,41.375) ; U8.10@57.145,21.175 59.197,21.175 ToF3.7 59.911,18.489 C36.1 C36.1@59.975,18.45 ; C37.1 59.85,11.6 C37.1@60.225,11.975 ; C37.1@59.875,11.9 59.911,11.936 ToF4.7 ; C35.1 59.944,29.456 ToF2.7
3V3: C2.1 C4.1 C12.1 C13.1 C14.1 C15.1 C16.1 C17.1 C18.1 C19.1 C20.1 C21.1 C25.1 C30.1 C31.1 C32.1 C33.1 C39.2 C42.2 J3.2 J3.4 R1.1 R7.1 R8.1 R9.1 ToF1.1 ToF2.1 ToF3.1 ToF4.1 U1.1 U1.11 U1.20 U1.30 U1.38 U1.44 U1.45 U1.49 U1.53 U1.54 U2.2 U2.4 U3.6 U4.8 U5.1 U5.3 U7.2 U7.10 U8.19 | length 38.9
  Top Layer w0.2: U1.49 39.27,32.72 ; C25.1 U5.1
  Top Layer w0.254: C4.1@38.901,33.612 39.085,33.428 39.085,32.905 39.27,32.72
  Top Layer w0.5: U3.6@7.12,56.89 15.624,56.89 16.606,55.908 16.606,54.759 U2.2
  Bottom Layer w0.2: C39.2 21.925,33.875 v1(21.925,32.475) 21.925,31.65 22.65,30.925 U7.2@23.04,30.925 ; U7.10 23.515,25.83 22.595,25.83 22.05,26.375 22.05,30.272 22.598,30.82 22.935,30.82 U7.2@23.04,30.925 ; U7.2 U7.2@23.04,30.925 ; U8.19 51.25,26.395 52.32,26.395 v1(53.175,27.25) 53.175,28.525 C42.2@53.2,28.55 ; C33.1@71.825,11.639 71.825,13.595 ToF4.1 ; C31.1@71.831,25.189 71.883,25.241 ToF2.1@71.883,27.309 ; C32.1@71.875,18.475 71.875,20.436 ToF3.1 ; C30.1 71.933,32.133 ToF1.1
5V: C1.1 C3.1 C7.1 C24.1 C27.1 C28.1 C29.1 C40.1 P1.1 U2.3 U3.5 U3.8 U7.19 U9.3 US1.1 US2.1 US3.1 US4.1 | length 33.2
  Top Layer w0.4: U9.3 5.483,62.058 C7.1 5.475,62.025 7.12,60.38 U3.8
  Bottom Layer w0.2: C24.1 US1.1 ; C28.1 2.5,24.075 US3.1 ; C3.1 4.65,48.925 5.515,49.79 P1.1 ; C27.1 12.75,36.45 US2.1 16.425,36.475 19.017,33.883 19.3,33.883 19.338,33.845 C40.1@19.338,33.613 ; C29.1 US4.1 ; U7.19 17.937,30.982 18.807,30.982 19.675,31.85 C40.1 ; C40.1@19.313,33.588 C40.1@19.338,33.613 ; C40.1@19.338,33.562 C40.1@19.338,33.613 ; C40.1@19.662,33.937 C40.1@19.338,33.613
AMP_OUT: U3.7 U9.1 | length 9.1
  Top Layer w0.2: U3.7 7.805,58.185 8.7,59.08 8.7,61.539 7.515,62.724 U9.1
D_N: J1.2 R2.1 Z2.2 | length 26.1
  Top Layer w0.277: J1.2 36.6,63.286 36.568,63.286 36.004,62.722 36.004,62.335 36.004,60.646 36.625,60.025 36.625,59.875 36.329,59.579 36.177,59.579 36.015,59.416 36.015,39.049 36.177,38.886 36.264,38.886 36.625,38.525 R2.1
D_P: J1.3 R3.1 Z1.2 | length 28.3
  Top Layer w0.277: R3.1 35,38.525 35.361,38.886 35.448,38.886 35.61,39.049 35.61,59.416 35.448,59.579 35.296,59.579 35,59.875 35,60.025 35.6,60.625 35.6,62.168 35.6,64.208 36.6,65.208 J1.3
DX_N: R2.2 U1.51 | length 7.2
  Top Layer w0.277: R2.2 36.625,36.875 36.264,36.514 36.177,36.514 36.015,36.351 36.015,34.621 38.475,32.161 U1.51@38.475,30.986
DX_P: R3.2 U1.52 | length 7.2
  Top Layer w0.277: R3.2 35,36.875 35.361,36.514 35.448,36.514 35.61,36.351 35.61,34.454 38.07,31.995 U1.52
ECHO_1(3V3): U1.5 U7.5 | length 11.1
  Top Layer w0.2: v1(29.325,29.275) 29.325,29.187 29.776,28.736 U1.5
  Bottom Layer w0.2: U7.5 25.277,28.975 25.752,29.45 29.042,29.45 29.217,29.275 v1(29.325,29.275)
ECHO_1(5V): U7.16 US1.3 | length 14.8
  Bottom Layer w0.2: US1.3 4.829,32.475 8.329,28.975 U7.16
ECHO_2(3V3): U1.3 U7.3 | length 11.2
  Top Layer w0.2: v1(30.55,30.175) 31.189,29.536 U1.3
  Bottom Layer w0.2: U7.3 25.053,30.275 25.403,30.625 29.992,30.625 30.442,30.175 v1(30.55,30.175)
ECHO_2(5V): U7.18 US2.3 | length 6
  Bottom Layer w0.2: US2.3 13.029,32.475 15.229,30.275 U7.18
ECHO_3(3V3): U1.8 U7.7 | length 11.2
  Top Layer w0.2: v1(29.85,26.95) 30.436,27.536 U1.8
  Bottom Layer w0.2: U7.7 24.85,27.675 25.601,26.924 29.824,26.924 v1(29.85,26.95)
ECHO_3(5V): U7.14 US3.3 | length 17.4
  Bottom Layer w0.2: US3.3 6.15,20.075 8.9,22.825 8.9,24.5 12.075,27.675 U7.14
ECHO_4(3V3): U1.10 U7.9 | length 11.1
  Top Layer w0.2: v1(31.552,26.35) 31.938,26.736 U1.10
  Bottom Layer w0.2: U7.9 23.647,26.348 24.577,26.348 24.975,25.95 31.043,25.95 31.443,26.35 v1(31.552,26.35)
ECHO_4(5V): U7.12 US4.3 | length 8.9
  Bottom Layer w0.2: US4.3 13.029,20.075 15.725,22.771 15.725,24.848 17.032,26.155 17.08,26.155 17.3,26.375 U7.12
FLASH_SS: J4.2 U4.1 | length 8
  Top Layer w0.2: U4.1@24.518,47.275 29.135,47.275 31.535,49.675
GND: B2.1 B2.2 C1.2 C2.2 C3.2 C4.2 C5.2 C6.2 C7.2 C8.1 C9.2 C10.2 C11.2 C12.2 C13.2 C14.2 C15.2 C16.2 C17.2 C18.2 C19.2 C20.2 C21.2 C22.2 C23.2 C24.2 C25.2 C26.2 C27.2 C28.2 C29.2 C30.2 C31.2 C32.2 C33.2 C34.2 C35.2 C36.2 C37.2 C38.2 C39.1 C40.2 C41.1 C42.1 J2.2 J3.10 J3.12 J3.14 J3.16 J3.18 J3.20 P1.2 P2.3 R4.1 R10.2 ToF1.2 ToF2.2 ToF3.2 ToF4.2 U1.47 U1.61 U2.1 U3.4 U4.4 U5.2 U6.1 U7.11 U8.11 US1.4 US2.4 US3.4 US4.4 Y1.2 Y1.4 | length 69.1
  Top Layer w0.2: v1@0.125,55.645 U3.4 ; U3.4@2.55,55.6 U3.4@2.55,55.62 ; C1.2 C1.2@18.418,59.675 ; v1(19.275,25.8) 21.475,28 25.205,28 25.58,28.375 C11.2 ; U4.4 24.628,43.423 26.153,43.423 v1(26.175,43.4) ; B2.1 v1(28.05,57.725) B2.2 ; v1(25.825,69.775) J2.2 ; v1(26.15,32.175) 27.4,32.175 C16.2 ; v1(26.798,24.802) C17.2@27.952,24.802 ; C17.2@27.752,24.827 C17.2@27.775,24.85 ; C20.2 v1(31.625,39.75) ; C18.2 v1(33.325,39.75) ; v1(34.025,16.45) C22.2 ; v1(34.025,18.475) 34.45,18.9 C15.2 ; C21.2 34.25,48.85 v1(34.25,50.35) ; v1(35.35,13.9) Y1.4 ; C10.2 39.05,18.85 v1(40.225,18.85) ; Y1.2 39.096,12.171 40.271,12.171 40.623,11.819 v1(40.731,11.819) ; U1.47 40.07,32.72 ; C4.2 40.825,34.025 v1(41.45,34.025) ; C23.2 40.675,16.425 v1(41.775,16.425) ; C12.2 46.5,19.925 v1(47.825,19.925) ; C13.2 v1(49.25,26.075) ; C9.2 48.25,27.875 v1(49.275,27.875) ; C14.2 48.26,32.385 v1(49.54,32.385) ; C19.2 48.225,34 v1(49.625,34) ; v1(49.983,3.327) 49.983,4.683 R4.1 ; C38.2 v1(61.275,42.275) ; v1(62.052,44.198) 62.052,45.377 62.9,46.225 U5.2 ; U6.1 67.375,40.67 v1(67.375,39.675) 70.375,39.675 R10.2 ; v1(68.775,44.175) C26.2@68.775,45.375
  Top Layer w0.254: 40.07,32.72 40.255,32.905 40.255,33.416 C4.2@40.451,33.612 ; C6.2@40.476,35.39 40.824,35.042 41.408,35.042 v1(41.45,35)
  Top Layer w0.3: v1(2.45,62.025) C7.2 ; v1(10.35,64.45) C8.1
  Top Layer w0.4: v1(11.82,43.989) C2.2@13.727,43.989 ; C1.2@18.418,59.675 18.443,59.65 v1(20.35,59.65) ; v1(18.85,56.61) 18.85,54.816 U2.1
  Top Layer w0.5: v1(41.95,31.6) C5.2@42.888,32.538
  Top Layer w0.6: C5.2@42.888,32.538 C5.2@42.888,32.552
  Bottom Layer w0.2: U7.11 17.918,25.763 19.238,25.763 v1(19.275,25.8)
  other v1: 36.3,26.175 37.661,26.175 39.025,26.175 36.3,27.489 37.661,27.489 39.025,27.489 36.3,28.9 37.636,28.9 39.025,28.9 0.125,55.625
GPIO10: J3.1 U1.14 | length 23.5
  Top Layer w0.2: J3.1 24.15,15.625 33.661,25.136 U1.14
GPIO11: J3.3 U1.15 | length 21.9
  Top Layer w0.2: J3.3 26.69,17.206 33.962,24.479 33.962,24.736 U1.15
GPIO12: J3.5 U1.16 | length 20.5
  Top Layer w0.2: J3.5 29.23,18.74 34.576,24.086 U1.16
GPIO13: J3.7 U1.17 | length 20.6
  Top Layer w0.2: J3.7 30.375,7.535 30.375,18.8 35.029,23.454 35.049,23.454 35.27,23.675 U1.17
GPIO14: J3.9 U1.18 | length 21.1
  Top Layer w0.2: J3.9 31.225,9.225 31.225,19 35.67,23.445 U1.18
GPIO15: J3.11 U1.19 | length 22.3
  Top Layer w0.2: v1(35.325,22.225) 36.07,22.97 U1.19
  Bottom Layer w0.2: v1(35.325,22.225) 32.1,19 32.1,9.625 34.275,7.45 35.54,7.45 J3.11
GPIO16: J3.13 U1.27 | length 28.1
  Top Layer w0.2: U1.27 39.27,23.13 44.15,18.25 46.1,18.25 46.925,17.425 46.925,9.05 46.15,8.275 41.525,8.275 J3.13
GPIO17: J3.15 U1.28 | length 26.4
  Top Layer w0.2: U1.28 39.67,23.23 44.25,18.65 46.5,18.65 47.525,17.625 47.525,8.988 46.17,7.632 43.422,7.632 J3.15
GPIO18: J3.17 U1.29 | length 24.8
  Top Layer w0.2: U1.29 40.07,23.33 44.4,19 46.975,19 48.125,17.85 48.125,8.989 45.564,6.427 44.757,6.427 J3.17
GPIO19: J3.19 U1.31 | length 24.3
  Top Layer w0.2: U1.31 41.564,24.736 45.1,21.2 47.725,21.2 v1(47.8,21.275)
  Bottom Layer w0.2: J3.19 48.65,7.78 48.65,20.425 v1(47.8,21.275)
INT0_1(1V8): ToF1.6 U8.3 | length 11.3
  Bottom Layer w0.2: U8.3@56.565,25.725 56.67,25.83 57.955,25.83 58.375,26.25 58.375,29.7 61.925,33.25 ToF1.6
INT0_1(3V3): U1.40 U8.18 | length 13
  Top Layer w0.2: U1.40 44.34,28.336 44.729,28.725 v1(44.8,28.725)
  Bottom Layer w0.2: v1(44.8,28.725) 44.89,28.725 45.165,29 48.95,29 49.9,28.05 49.9,26.175 50.35,25.725 U8.18@51.405,25.725
INT0_2(1V8): ToF2.6 U8.5 | length 6.9
  Bottom Layer w0.2: U8.5@57.145,24.425 60.725,24.425 61.925,25.625 ToF2.6
INT0_2(3V3): U1.36 U8.16 | length 11.1
  Top Layer w0.2: U1.36 43.164,26.736 v1(45.375,24.525)
  Bottom Layer w0.2: v1(45.375,24.525) 45.483,24.525 45.583,24.425 U8.16
INT0_3(1V8): ToF3.6 U8.7 | length 6.5
  Bottom Layer w0.2: U8.7@57.145,23.125 60.35,23.125 61.892,21.583 ToF3.6
INT0_3(3V3): U1.34 U8.14 | length 11.3
  Top Layer w0.2: U1.34 42.462,25.936 45.273,23.125 45.55,23.125 v1(46.05,23.125)
  Bottom Layer w0.2: v1(46.05,23.125) U8.14
INT0_4(1V8): ToF4.6 U8.9 | length 14.7
  Bottom Layer w0.2: U8.9 55.925,21.825 55.125,21.025 55.125,17.5 56.259,16.366 60.259,16.366 61.892,14.733 ToF4.6
INT0_4(3V3): U1.32 U8.12 | length 11.5
  Top Layer w0.2: U1.32 41.964,25.136 45.3,21.8 v1(47.05,21.8)
  Bottom Layer w0.2: v1(47.05,21.8) 47.063,21.813 51.218,21.813 U8.12
NetB1_1: B1.1 B1.2 R4.2 | length 10.1
  Top Layer w0.2: B1.1 B1.2 50.025,6.375 R4.2@50.1,6.3
NetC23_1: C23.1 R5.1 Y1.3 | length 6.4
  Top Layer w0.2: R5.1 37.325,17.775 38.85,16.25 38.825,16.25 38.65,16.075 38.65,16.05 38.15,15.55 38.15,14.7 38.209,14.641 38.95,13.9 Y1.3
NetC38_1: C38.1 R7.2 U6.7 U6.8 | length 5.6
  Top Layer w0.2: R7.2@58.375,40.675 C38.1 ; C38.1@60.275,40.7 U6.8@63.405,40.7 ; U6.8 U6.7
NetF1_1: F1.1 J1.1 | length 18.7
  Top Layer w0.4: F1.1@17,67.425 F1.1 24.05,67.425 28.025,63.45 J1.1
NetFB1_1: FB1.1 J1.S1 J1.S2 Z1.1 Z2.1 | length 42.2
  Top Layer w0.2: FB1.1 26.191,77.148 26.452,77.148 29.33,74.27 J1.S2 33.4,68.15 ; Z1.1 33.44,60.02 33.774,60.355 33.845,60.355 35.15,61.66 35.15,66.4 33.4,68.15 ; Z2.1 40.95,62.715 40.95,67.73 J1.S1 33.4,68.15
QSPI_SCLK: U1.56 U4.6 | length 20.8
  Top Layer w0.2: U4.6 32.39,44.715 32.557,44.548 32.557,44.518 33.4,43.675 33.4,42.225 32.5,41.325 31.15,41.325 30.15,40.325 30.15,35.675 31.5,34.325 33.95,34.325 36.47,31.805 U1.56
QSPI_SD0: U1.57 U4.5 | length 18.2
  Top Layer w0.2: U4.5 30.92,43.445 29.575,42.1 29.575,35.525 31.15,33.95 33.75,33.95 36.07,31.63 U1.57
QSPI_SD1: U1.59 U4.2 | length 22.5
  Top Layer w0.2: U4.2 24.11,45.985 23.943,45.818 23.45,45.325 23.45,40.1 30.45,33.1 33.567,33.1 35.27,31.397 U1.59
QSPI_SD2: U1.58 U4.3 | length 20.7
  Top Layer w0.2: U4.3 24.62,44.7 25.925,44.7 27.962,42.663 27.962,36.363 30.792,33.533 33.642,33.533 35.67,31.505 U1.58
QSPI_SD3: U1.55 U4.7 | length 22.4
  Top Layer w0.2: U4.7@31.764,45.906 31.852,45.818 32.607,45.818 34.125,44.3 34.125,41.95 32.9,40.725 31.575,40.725 30.65,39.8 30.65,35.975 31.85,34.775 34.05,34.775 36.87,31.955 U1.55
QSPI_SS: J4.1 R6.2 U1.60 | length 31.4
  Top Layer w0.2: J4.1 29.925,50.35 R6.2 26.3,50.35 22.825,46.875 22.825,39.975 30.175,32.625 33.5,32.625 34.834,31.291 34.87,31.291 U1.60
RUN: B1.3 B1.4 U1.26 | length 17.5
  Top Layer w0.2: U1.26 38.87,23.071 44.015,17.925 45.031,17.925 45.423,17.533 45.423,16.502 B1.4 B1.3
SCL(1V8): R12.2 ToF1.3 ToF2.3 ToF3.3 ToF4.3 U6.3 | length 36.8
  Top Layer w0.2: ToF4.3 67.928,13.686 67.928,20.461 67.928,27.27 67.928,34.045 ToF1.3 66.325,35.681 66.325,41.771 66.497,41.943 67.288,41.943 U6.3 69.425,42 72.375,44.95 R12.2
SCL(3V3): R9.2 U1.43 U6.6 | length 38.7
  Top Layer w0.2: U1.43 42.111,29.536 43.775,31.2 51.3,31.2 59.675,39.575 61.7,39.575 ; R9.2@58.05,45.8 58.075,45.8 R9.2@58.475,45.4 ; R9.2@58.475,45.375 R9.2@58.475,45.4 ; R9.2 R9.2@58.475,45.4 ; 61.575,39.575 64.375,39.575 64.975,40.175 64.975,41.382 64.457,41.9 63.905,41.9 U6.6 ; U6.6@63.62,42.015 62.435,42.015 61.175,43.275 60.075,43.275 58.483,44.867 58.483,45.392 R9.2@58.475,45.4
SDA(1V8): R11.2 ToF1.4 ToF2.4 ToF3.4 ToF4.4 U6.4 | length 34.9
  Top Layer w0.2: ToF4.4 65.922,13.686 65.922,20.461 65.922,27.27 65.922,34.045 ToF1.4 65.938,42.138 66.35,42.55 67.245,42.55 U6.4 68.35,42.65 70.567,44.867 70.567,45.15 70.63,45.213 R11.2@70.913,45.213
SDA(3V3): R8.2 U1.42 U6.5 | length 38
  Top Layer w0.2: U1.42 42.961,29.136 44.325,30.5 51.7,30.5 60.1,38.9 64.5,38.9 65.375,39.775 65.375,42.165 64.89,42.65 U6.5 ; R8.2 60.283,45.567 60.283,44.867 62.5,42.65 U6.5@63.792,42.65
SWCLK: J3.6 U1.24 | length 34.3
  Top Layer w0.2: J3.6 30.655,5.025 35.125,5.025 35.579,5.479 35.579,6.579 37.875,8.875 42.45,8.875 43.625,10.05 43.625,17.168 39.593,21.2 39.233,21.2 38.5,21.933 38.5,21.942 38.07,22.373 U1.24
SWD: J3.8 U1.25 | length 32
  Top Layer w0.2: U1.25 38.47,22.705 v1(38.927,22.248)
  Bottom Layer w0.2: J3.8 32.961,4.791 37.022,4.791 38.1,5.868 38.1,7.1 39.5,8.5 42.575,8.5 43.95,9.875 43.95,17.225 v1(38.927,22.248)
TRIG_1(3V3): U1.4 U7.4 | length 11.2
  Top Layer w0.2: v1(29.85,29.8) 29.85,29.742 30.456,29.136 U1.4
  Bottom Layer w0.2: U7.4 25.1,29.625 25.575,30.1 29.458,30.1 29.758,29.8 v1(29.85,29.8)
TRIG_1(5V): U7.17 US1.2 | length 15.4
  Bottom Layer w0.2: US1.2 4.829,34.475 9.753,29.552 17.807,29.552 U7.17
TRIG_2(3V3): U1.2 U7.1 | length 11.3
  Top Layer w0.2: v1(31.412,30.424) 31.901,29.936 U1.2
  Bottom Layer w0.2: U7.1 25.075,31.575 25.475,31.175 30.662,31.175 v1(31.412,30.424)
TRIG_2(5V): U7.20 US2.2 | length 6.3
  Bottom Layer w0.2: US2.2 14.4,34.475 17.3,31.575 U7.20
TRIG_3(3V3): U1.7 U7.6 | length 11.2
  Top Layer w0.2: v1(29.324,27.449) 29.342,27.449 29.829,27.936 U1.7@34.25,27.936
  Bottom Layer w0.2: U7.6 24.85,28.325 25.726,27.449 v1(29.324,27.449)
TRIG_3(5V): U7.15 US3.2 | length 15.9
  Bottom Layer w0.2: US3.2 5.075,22.075 11.325,28.325 U7.15
TRIG_4(3V3): U1.9 U7.8 | length 11.1
  Top Layer w0.2: v1(30.65,26.6) 30.753,26.6 31.289,27.136 U1.9
  Bottom Layer w0.2: U7.8 24.675,27.025 25.275,26.425 30.367,26.425 30.542,26.6 v1(30.65,26.6)
TRIG_4(5V): U7.13 US4.2 | length 8.1
  Bottom Layer w0.2: US4.2 13.029,22.075 14.82,23.866 14.82,25.47 16.375,27.025 U7.13
U\S\B\_\B\O\O\T\: B2.3 B2.4 R6.1 | length 9.6
  Top Layer w0.2: B2.4@24.617,52.967 B2.4@24.746,53.096 ; R6.1@24.75,50.35 24.75,51.45 24.746,51.446 B2.4@24.746,53.096 ; B2.3 B2.4 B2.4@24.746,53.096
UART1_RX: P2.2 U1.13 | length 29.6
  Top Layer w0.2: P2.2 18,8.4 22.2,12.6 22.2,14.8 32.863,25.463 33.842,25.463 33.915,25.536 U1.13
UART1_TX: P2.1 U1.12 | length 27.7
  Top Layer w0.2: P2.1 15.3,10.4 16.8,11.9 ; 16.775,11.9 28.125,23.25 29.888,23.25 32.574,25.936 U1.12
USB_GND: FB1.2 J1.4 J2.1 | length 17.4
  Top Layer w0.2: FB1.2 25.825,75.736 J2.1 27,71.98 27,66.8 28.635,65.165 33.379,65.165 33.433,65.219 33.869,65.219 J1.4
USB_VCC: C8.2 F1.2 U9.2 | length 6.3
  Top Layer w0.4: U9.2@7.55,67.6 C8.2 10.366,67.584 12.3,67.584 12.85,67.034 F1.2@12.85,66.275
VREG_AVDD: C5.1 R1.2 U1.46 | length 6.4
  Top Layer w0.2: U1.46 40.47,31.629 42.525,33.684 42.525,33.8 C5.1 R1.2@42.9,36.375
VREG_LX: L1.2 U1.48 | length 6.6
  Top Layer w0.203: U1.48 39.67,32.774
  Top Layer w0.254: 39.67,32.774 39.67,35.925 40.663,36.919 L1.2@40.663,37.219
X\S\H\U\T\1\(1V8): ToF1.5 U8.1 | length 12.7
  Bottom Layer w0.2: U8.1@57.145,27.025 57.145,29.27 60.8,32.925 60.8,34.45 61.325,34.975 63.018,34.975 ToF1.5
X\S\H\U\T\1\(3V3): U1.41 U8.20 | length 12
  Top Layer w0.2: U1.41 43.625,28.736 v1(44.218,29.33)
  Bottom Layer w0.2: v1(44.218,29.33) 44.272,29.33 44.468,29.525 49.525,29.525 51.405,27.645 U8.20@51.405,27.025
X\S\H\U\T\2\(1V8): ToF2.5 U8.4 | length 9.7
  Bottom Layer w0.2: U8.4@57.145,25.075 60.45,25.075 60.875,25.5 60.875,27.55 61.625,28.3 62.902,28.3 ToF2.5
X\S\H\U\T\2\(3V3): U1.37 U8.17 | length 11
  Top Layer w0.2: U1.37 43.398,27.136 45.075,25.459 v1(45.184,25.459)
  Bottom Layer w0.2: v1(45.184,25.459) 45.567,25.075 U8.17
X\S\H\U\T\3\(1V8): ToF3.5 U8.6 | length 8.8
  Bottom Layer w0.2: U8.6@57.145,23.775 61.65,23.775 63.397,22.028 63.397,21.026 63.899,20.525 ToF3.5
X\S\H\U\T\3\(3V3): U1.35 U8.15 | length 11.2
  Top Layer w0.2: U1.35 42.639,26.336 45.2,23.775 v1(45.725,23.775)
  Bottom Layer w0.2: v1(45.725,23.775) U8.15
X\S\H\U\T\4\(1V8): ToF4.5 U8.8 | length 19.6
  Bottom Layer w0.2: U8.8@56.845,22.52 55.27,22.52 54.325,21.575 54.325,17.125 56.025,15.425 59.55,15.425 60.85,14.125 60.85,13.245 61.32,12.775 63.004,12.775 ToF4.5
X\S\H\U\T\4\(3V3): U1.33 U8.13 | length 11.5
  Top Layer w0.2: U1.33 42.164,25.536 45.402,22.298 46.223,22.298 v1(46.3,22.375)
  Bottom Layer w0.2: v1(46.3,22.375) 46.35,22.425 51.18,22.425 U8.13
XIN: C22.1 U1.21 Y1.1 | length 13.1
  Top Layer w0.2: Y1.1 36.9,12.15 37.325,12.575 37.325,12.7 37.7,13.075 37.7,15.537 37.162,16.075 37.125,16.075 36.5,16.7 36.5,20.996 36.87,21.366 U1.21
XOUT: R5.2 U1.22 | length 3.6
  Top Layer w0.2: R5.2@37.27,20.53 U1.22
  Top Layer w0.254: R5.2@37.27,20.53 R5.2
pads on no net: U3.1 U3.2 U3.3 U5.4

## Polygon pours and split planes (outlines as drawn)
3V3 on Top Layer "T.3V3-2" (solid, remove dead copper, pour order 13): -3.098,-2.802 cw(c-0.93,-0.634) -3.996,-0.634 -3.996,76.326 cw(c-0.93,76.326) -3.098,78.494 -2.894,78.698 cw(c-0.726,76.53) -0.726,79.596 69.946,79.596 cw(c70.395,74.75) 73.504,78.494 cw(c71.423,76.116) 74.576,76.326 74.576,-0.616 cw(c70.253,-0.033) 72.898,-3.502 cw(c71.081,-0.487) 70.234,-3.904 -0.726,-3.904 cw(c-0.726,-0.838) -2.894,-3.006
5V on Top Layer "T.5V" (solid, pour order 12): -4,22.152 3.804,22.119 12.9,22.119 15.219,22.125 16.919,23.825 16.919,37.288 10.6,43.648 10.6,48.15 14.675,52.225 14.675,61.663 8.994,67.344 -4,67.344
GND on Top Layer "T.GND-1" (solid, pour order 10): 41.625,17.9 42.6,16.925 42.6,9.7 33.1,9.7 33.1,16.952 33.947,17.9
3V3 on Top Layer "T.3V3-1" (solid, pour order 11): 42.45,22.95 32.725,22.95 32.725,32.475 42.45,32.475
1V1 on Top Layer "T.1V1-1" (solid, pour order 9): 35.5,29.7 39.9,29.7 39.9,25.3 35.5,25.3
GND on Bottom Layer "B.GND-1" (solid, remove dead copper, pour order 14): -3.102,-2.898 cw(c-0.934,-0.73) -4,-0.73 -4,76.23 cw(c-0.934,76.23) -3.102,78.398 -2.898,78.602 cw(c-0.73,76.434) -0.73,79.5 71.982,79.5 cw(c71.994,79.419) 72.043,79.485 cw(c70.76,75.996) 74.471,76.221 74.462,-0.73 cw(c71.13,-0.693) 73.46,-3.075 72.925,-3.5 cw(c70.974,-0.497) 70.23,-4 -0.73,-4 cw(c-0.73,-0.934) -2.898,-3.102

## Keep-outs
Keep-Out Layer:
  lines w0.5: -1,-4 71.5,-4 ; -0.73,-4 cw(c-0.73,-0.934) -2.898,-3.102 -3.102,-2.898 cw(c-0.934,-0.73) -4,-0.73 -4,76.23 cw(c-0.934,76.23) -3.102,78.398 -2.898,78.602 cw(c-0.73,76.434) -0.73,79.5 70.942,79.5 cw(c70.942,75.738) 73.602,78.398 cw(c71.434,76.23) 74.5,76.23 ; 71.23,-4 ccw(c71.23,-0.934) 73.398,-3.102 ccw(c70.738,-0.442) 74.5,-0.442 74.5,76.5

## Silkscreen, mask and mechanical layers (free items; w line width, h text height)
Top Overlay:
  drawing of 56 lines, arcs and shapes, not listed
  text "Distance Sensor Board [v2]" at 42.004,76.154 h1.02
  text "1/25/2026" at 57.704,74.554 h1.02
  text "Aiden Shepler" at 42.029,74.493 h1.02
  text "Power" at 15.103,70.203 h0.89
  text "MCU & Peripherals" at 53.574,66.022 h0.89 r270
  text "+" at 11.804,59.206 h0.89
  text "5V" at -1.897,48.228 h0.89
  text "Time of Flight Sensors" at 54.774,47.872 h0.89 r270
  text "GND" at -2.397,46.028 h0.89
  text "+" at 20.029,43.581 h0.89
  text "Ultrasonic Sensors" at 4.103,39.303 h0.89
  text "5V" at -2.007,36.206 h0.89
  text "TRIG" at -2.847,34.228 h0.89
  text "ECHO" at -2.747,32.228 h0.89
  text "GND" at -2.452,30.206 h0.89
  text "pTX" at -1.877,10.154 h0.89
  text "XSHUT" at 63.487,9.79 h0.89 r270
  text "SDA" at 65.478,9.772 h0.89 r270
  text "SCL" at 67.578,9.772 h0.89 r270
  text "INT0" at 61.481,9.272 h0.89 r270
  text "GND" at 69.482,8.901 h0.89 r270
  text "1V8" at 59.499,8.827 h0.89 r270
  text "5V" at 71.488,8.457 h0.89 r270
  text "pRX" at -1.877,8.154 h0.89
  text "GND" at -1.877,6.006 h0.89
  text "1V8" at 64.452,3.452 h0.51
  text "GPIO10" at 22.777,0.677 h0.51
  text "11" at 26.394,0.627 h0.51
  text "12" at 28.849,0.57 h0.51
  text "13" at 31.389,0.47 h0.51
  text "14" at 33.929,0.47 h0.51
  text "15" at 36.469,0.47 h0.51
  text "16" at 39.009,0.47 h0.51
  text "17" at 41.549,0.47 h0.51
  text "18" at 44.089,0.47 h0.51
  text "GPIO19" at 45.656,0.427 h0.51
  text "GND" at 43.793,-0.973 h0.51
  text "3V3" at 23.476,-1.072 h0.51 r0.58
  text "GND" at 28.553,-1.073 h0.51
  text "GND" at 31.093,-1.073 h0.51
  text "GND" at 33.633,-1.073 h0.51
  text "GND" at 36.173,-1.073 h0.51
  text "GND" at 38.713,-1.073 h0.51
  text "GND" at 41.253,-1.073 h0.51
  text "GND" at 46.333,-1.073 h0.51
  text "3V3" at 25.976,-1.097 h0.51 r0.58
Bottom Overlay:
  drawing of 10 lines, arcs and shapes, not listed
  text "(70.5mm MH to MH) 79mm" at 21.872,77.403 h0.89
  text "2.54mm" at 9.022,72.903 h0.89
  text "(75.5mm MH to MH) 83.5mm" at -2.597,51.828 h0.89 r270